# Altium PCB Attenuator_Proto.PcbDoc
Units mil, origin at the board's own origin, x right, y up, seen from the top; angles counter-clockwise.
Board outline 3679.97 x 2314.97 mil, 2 copper layers (Top Layer, Bottom Layer); 101 components, 62 nets, 362 pads, 43 vias.
Unrouted connection lines stored in the file: 42.
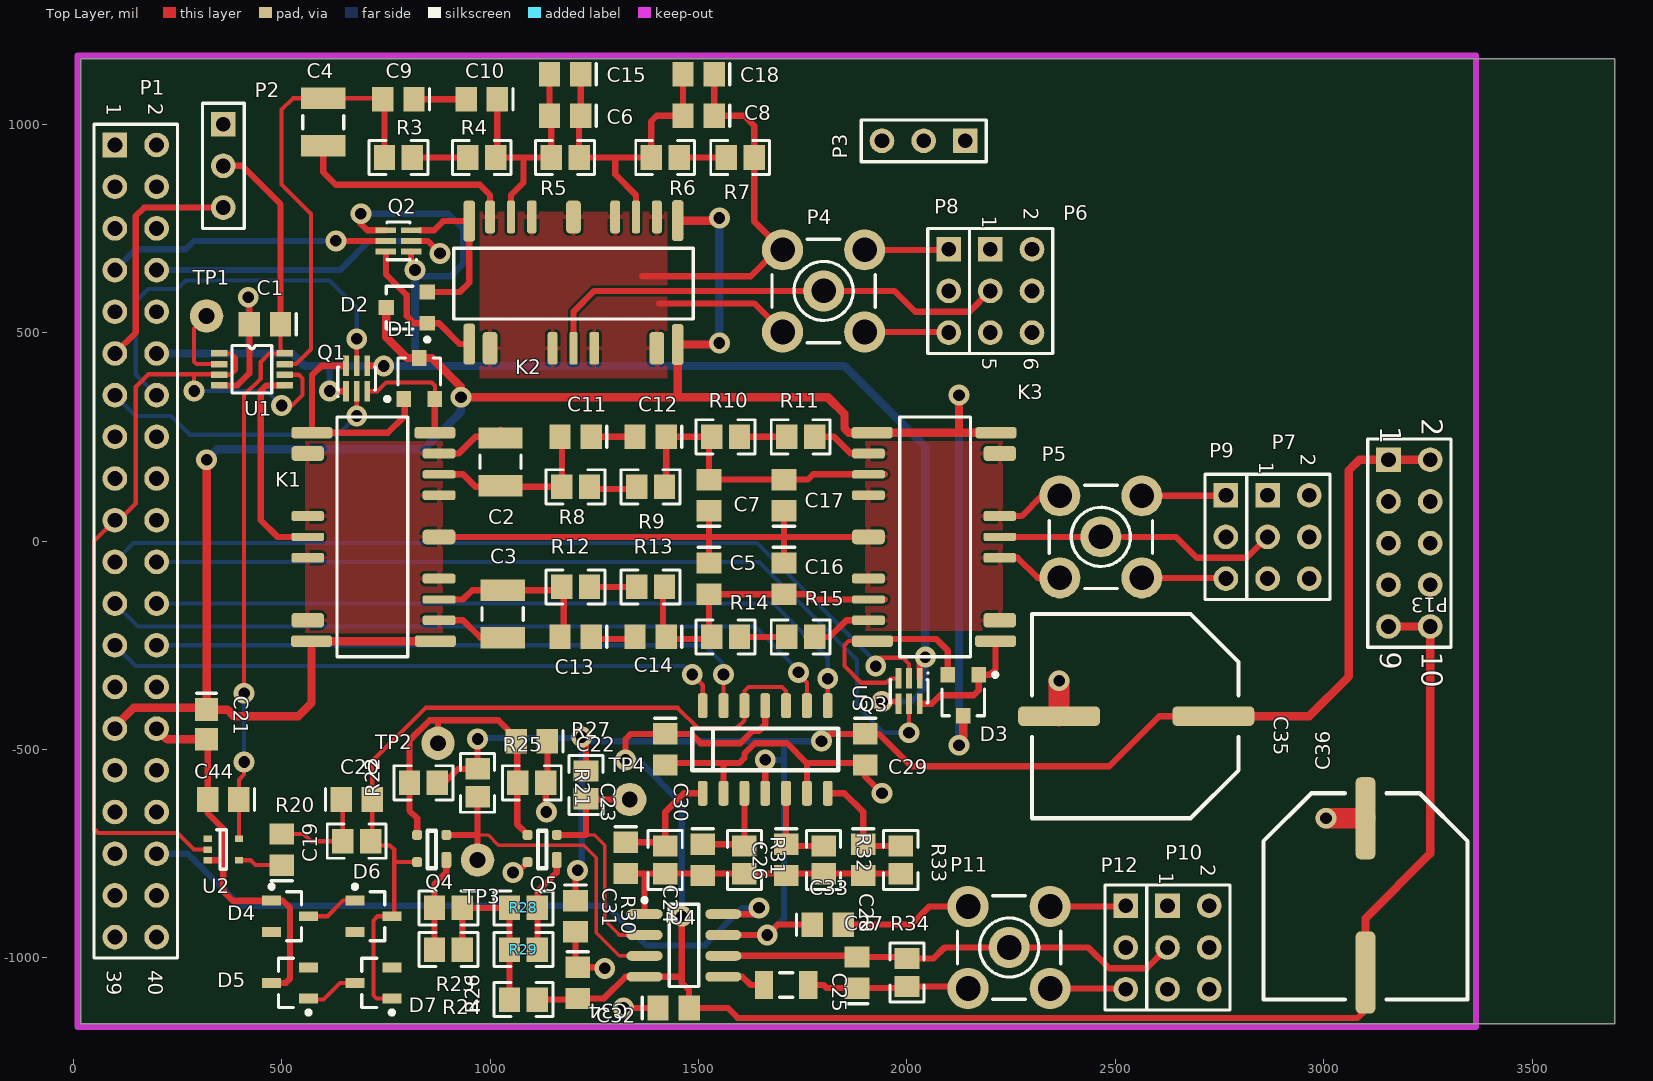
[diagram p0: Top Layer view]
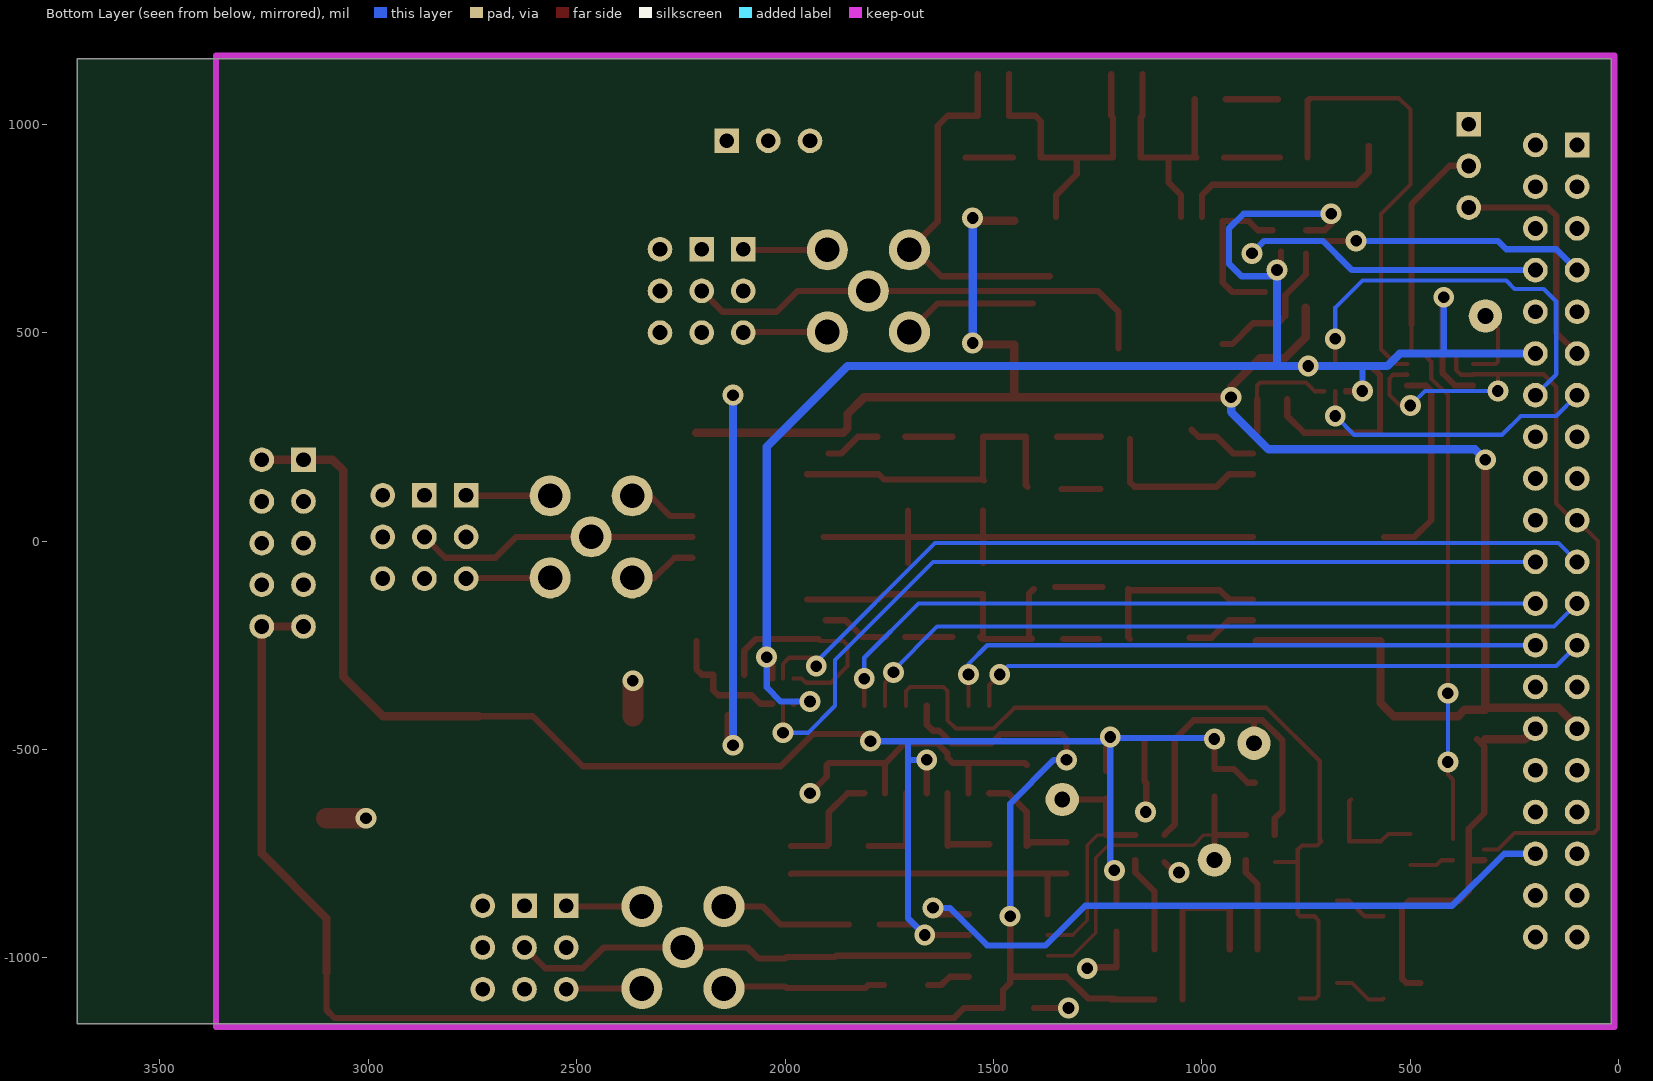
[diagram p1: Bottom Layer view, seen from below]

## Layer stack, top to bottom
Top Layer: signal copper 1.4
Dielectric: dielectric 12.6, FR-4, Dk 4.8
Bottom Layer: signal copper 1.4

## Board outline
17.52,-1157.48 17.52,1157.48 3697.48,1157.48 3697.48,-1157.48

## Design rules (kind name [scope] priority, off if disabled: settings)
Clearance [All] p1: gap=6
DiffPairsRouting [All] p1: maxlimit=10 minlimit=6 mostfreqgap=8 maxuncoupledlength=500
HoleSize [All] p1: absolutevalues=TRUE maxlimit=300 minlimit=13 maxpercent=80.000 minpercent=20.000
HoleToHoleClearance [All] p1: gap=6 allowstackedmicrovias=TRUE
MinimumAnnularRing [All] p1: minimumring=7
MinimumSolderMaskSliver [All] p1: minsoldermaskwidth=1
PolygonConnect [All] p1: connectstyle=Relief reliefconductorwidth=10 reliefentries=4 polygonreliefangle="90 Angle"
RoomDefinition Attenuator_Proto [InComponentClass('Attenuator_Proto')] p1: confinementstyle=ConfineOut formatcopy=TRUE lockcomponents=FALSE outline -65,1310 805,1310 805,1955 -65,1955
RoomDefinition Att_steet_1 [InComponentClass('Att_steet_1')] p2: confinementstyle=ConfineOut formatcopy=TRUE lockcomponents=FALSE outline 2685,-1500 3480,-1500 3480,-1240 2685,-1240
RoutingVias [All] p1: holewidth=20 width=38 viastyle="Through Hole" minholewidth=13 minwidth=28 maxholewidth=28 maxwidth=50
SilkToSilkClearance [All] p1: silktosilkclearance=6
SilkscreenOverComponentPads [All] p1: minsilkscreentomaskgap=6
SolderMaskExpansion [All] p1: expansion=4
Width [All] p1: maxlimit=50 minlimit=6 preferedwidth=10
22 further rules are at their usual default settings.

## Classes and differential pairs
component class Attenuator_Proto: C1 C2 C3 C4 C5 C6 C7 C8 C9 C10 C11 C12 C13 C14 C15 C16 C17 C18 C21 D1 D2 D3 K1 K2 K3 P1 P2 P3 P4 P5 P6 P7 P8 P9 Q1 Q2 Q3 R3 R4 R5 R6 R7 R8 R9 R10 R11 R12 R13 R14 R15 TP1 U1
component class Att_steet_1: 1 C19 C20 C22 C23 C24 C25 C26 C27 C28 C29 C30 C31 C32 C33 C34 C35 C36 C44 D4 D5 D6 D7 P10 P11 P12 P13 Q4 Q5 R20 R21 R22 R23 R24 R25 R26 R27 R28 R29 R30 R31 R32 R33 R34 TP2 TP3 TP4 U2 U3 U4

## Components (designator, comment, footprint, x,y, rotation, side; value= is the part's Value field where it differs from the comment)
C1 "Cap" C0805 460,520 r180 top
C2 "Cap Var" CAPC3225N 1025,190 r270 top
C3 "Cap Var" CAPC3225N 1030,-175 r90 top
C4 "Cap Var" CAPC3225N 600,1005 r90 top
C5 "Cap" c0805 1525,-90 r270 top
C6 "Cap" c0805 1180,1020 r180 top
C7 "Cap" c0805 1525,110 r90 top
C8 "Cap" c0805 1500,1020 r180 top
C9 "Cap" c0805 780,1060 r180 top
C10 "Cap" c0805 980,1060 r180 top
C11 "Cap" c0805 1205,250 r180 top
C12 "Cap" c0805 1385,250 r180 top
C13 "Cap" c0805 1205,-230 r180 top
C14 "Cap" c0805 1385,-230 r180 top
C15 "Cap" c0805 1180,1120 r180 top
C16 "Cap" c0805 1705,-90 r270 top
C17 "Cap" c0805 1705,110 r90 top
C18 "Cap" c0805 1500,1120 r180 top
C19 "C0805" 0805#1 500,-740 r90 top
C20 "C0805" 0805#1 680,-620 r0 top
C21 "Cap Semi" CAPC2512L 320,-440 r270 top
C22 "C0805" 0805#1 1100,-480 r180 top
C23 "C0805" 0805#1 1325,-760 r270 top
C24 "C0805" 0805#1 1510,-765 r270 top
C25 "Cap Semi" CAPC3216L 1710,-1065 r0 top
C26 "C0805" 0805#1 1710,-765 r270 top
C27 "C0805" 0805#1 1880,-1035 r90 top
C28 "C0805" 0805#1 1895,-765 r270 top
C29 "C0805" 0805#1 1900,-500 r270 top
C30 "C0805" 0805#1 1420,-500 r270 top
C31 "C0805" 0805#1 1205,-900 r270 top
C32 "C0805" 0805#1 1210,-1060 r270 top
C33 "C0805" 0805#1 1810,-920 r0 top
C34 "C0805" 0805#1 1440,-1120 r0 top
C35 "Cap" H13 2550,-420 r90 top
C36 "Cap" H13 3100,-850 r180 top
C44 "Cap" C0805 360,-620 r180 top
D1 "BAS40-05" SOT-23 830,390 r0 top
D2 "BAS40-05" SOT-23 800,560 r90 top
D3 "BAS40-05" SOT-23 2135,-370 r180 top
D4 "Diode BAS21" SOT95P240-3N 520,-900 r0 top
D5 "Diode BAS21" SOT95P240-3N 520,-1060 r180 top
D6 "Diode BAS21" SOT95P240-3N 720,-900 r0 top
D7 "Diode BAS21" SOT95P240-3N 720,-1060 r180 top
K1 "HF3_2coils_latching" HF3-75_Ohm 720,10 r0 top
K2 "HF3_2coils_latching" HF3-75_Ohm 1200,620 r90 top
K3 "HF3_2coils_latching" HF3-75_Ohm 2065,10 r180 top
P1 "Header 20X2" HDR2X20 100,950 r270 top locked
P2 "Header 3" HDR1X3 360,1000 r270 top
P3 "Header 3" HDR1X3 2140,960 r180 top
P4 "SMB" SMB_V-RJ45 1800,600 r0 top
P5 "SMB" SMB_V-RJ45 2465,10 r0 top
P6 "Header 3X2" HDR2X3 2200,700 r270 top
P7 "Header 3X2" HDR2X3 2865,110 r270 top
P8 "Header 3" HDR1X3 2100,700 r270 top
P9 "Header 3" HDR1X3 2765,110 r270 top
P10 "Header 3X2" HDR2X3 2625,-875 r270 top
P11 "SMB" SMB_V-RJ45 2245,-975 r0 top
P12 "Header 3" HDR1X3 2525,-875 r270 top
P13 "Header 5X2" HDR2X5 3155,195 r270 top
Q1 "DDCxxxxU" SOT-363 680,390 r0 top
Q2 "DDCxxxxU" SOT-363 780,720 r90 top
Q3 "DDCxxxxU" SOT-363 2005,-360 r180 top
Q4 "MOSFET" SOT143 860,-740 r90 top
Q5 "MOSFET" SOT143 1125,-740 r90 top
R3 "Res2" 0805#2 780,920 r180 top
R4 "Res2" 0805#2 980,920 r180 top
R5 "Res2" 0805#2 1180,920 r180 top
R6 "Res2" 0805#2 1420,920 r180 top
R7 "Res2" 0805#2 1600,920 r180 top
R8 "Res2" 0805#2 1205,130 r180 top
R9 "Res2" 0805#2 1385,130 r180 top
R10 "Res2" 0805#2 1565,250 r180 top
R11 "Res2" 0805#2 1745,250 r180 top
R12 "Res2" 0805#2 1205,-110 r180 top
R13 "Res2" 0805#2 1385,-110 r180 top
R14 "Res2" 0805#2 1565,-230 r180 top
R15 "Res2" 0805#2 1745,-230 r180 top
R20 "ERA6Y" 0805#2 680,-720 r180 top
R21 "ERA6Y" 0805#2 1100,-580 r0 top
R22 "ERA6Y" 0805#2 840,-580 r180 top
R23 "ERA6Y" 0805#2 900,-880 r180 top
R24 "ERA6Y" 0805#2 900,-980 r180 top
R25 "ERA6Y" 0805#2 970,-580 r270 top
R26 "ERA6Y" 0805#2 1080,-1100 r180 top
R27 "ERA6Y" 0805#2 1230,-585 r270 top
R28 "ERA6Y" 0805#2 1080,-880 r180 top
R29 "ERA6Y" 0805#2 1080,-980 r180 top
R30 "ERA6Y" 0805#2 1420,-765 r270 top
R31 "ERA6Y" 0805#2 1610,-765 r270 top
R32 "ERA6Y" 0805#2 1800,-765 r270 top
R33 "ERA6Y" 0805#2 1985,-765 r270 top
R34 "ERA6Y" 0805#2 2000,-1035 r90 top
TP1 "TESTPOINT" TESTPOINT 320,540 r0 top
TP2 "TESTPOINT" TESTPOINT 875,-485 r0 top
TP3 "TESTPOINT" TESTPOINT 970,-765 r0 top
TP4 "TESTPOINT" TESTPOINT 1335,-620 r0 top
U1 "SN74LVC3G17DCTR" sm8 350,450 r0 top
U2 "SN74LVC1G17" SC_70_5 360,-740 r270 top
U3 "AD8182" SO14 1660,-500 r0 top
U4 "AD707AR" SO-8_N 1465,-970 r0 top

## Footprints (in the part's own frame and the unit in brackets; to place one, negate y for a bottom-side part, rotate by r counter-clockwise, add the part's x,y. Pads: shape width x height; smd on the part's side, far side on the other; paste and mask are expansions set on the pad)
0805#1 [mm] "Chip Capacitor; Body 2.0 x 1.2 mm (LxW typ)"
  rect 1.3x1.5 smd: 1(-0.95,0) 2(0.95,0)
  silkscreen extent -1.9,-0.65 -1.9,0.65
0805#2 [mm] "0805 from SM-752 data"
  rect 1.3x1.5 smd: 1(-0.85,0) 2(0.85,0)
  silkscreen extent -1.79,-1.04 1.79,1.04, body extent -1.1,-0.72 1.1,0.72, height 1.1
C0805 [mm] "Chip Capacitor; Body 2.0 x 1.2 mm (LxW typ)"
  rect 1.3x1.5 smd: 1(-0.95,0) 2(0.95,0)
  silkscreen extent -1.9,-0.65 -1.9,0.65
c0805 [mm] "Chip Capacitor; Body 2.0 x 1.2 mm (LxW typ)"
  rect 1.3x1.5 smd: 1(-0.95,0) 2(0.95,0)
  silkscreen extent -1.9,-0.65 -1.9,0.65
CAPC2512L [mm] "Chip Capacitor, Body 2.54x1.27mm, IPC High Density"
  rect 1.4x1.4 smd: 1(-0.9,0) 2(0.9,0)
  silkscreen extent -1.9,-0.6 -1.9,0.6, body extent -1.45,-0.82 1.45,0.82, height 1.3
CAPC3216L [mm] "Chip Capacitor, Body 3.2x1.6mm, IPC High Density"
  rect 1.1x1.7 smd: 1(-1.35,0) 2(1.35,0)
  silkscreen extent -0.4,-0.75 0.4,0.75, body extent -1.7,-0.9 1.7,0.9, height 1.3
CAPC3225N [mm] "Chip Capacitor, Body 3.2x2.5mm, IPC Medium Density"
  rect 1.3x2.7 smd: 1(-1.45,0) 2(1.45,0)
  silkscreen extent -0.4,-1.25 0.4,1.25, body extent -1.7,-1.35 1.7,1.35, height 1.5
H13 [mm] "Lyt aluminum Cap SMD"
  rrect50% 1.2x5 smd: 1(0,-4.699) 2(0,4.699)
  silkscreen extent -6.22,-6.22 6.22,6.35
HDR1X3 [mm] "Connector; Header; 3 Position"
  rect 1.5x1.5 hole 0.9: 1(0,0)
  round 1.5 hole 0.9: 2(2.54,0) 3(5.08,0)
  silkscreen extent -1.27,-1.27 6.35,1.27
HDR2X3 [mm] "Connector; Header; 3x2 Position"
  rect 1.5x1.5 hole 0.9: 1(0,0)
  round 1.5 hole 0.9: 2(0,2.54) 3(2.54,0) 4(2.54,2.54) 5(5.08,0) 6(5.08,2.54)
  silkscreen extent -1.27,-1.27 6.35,3.81
HDR2X5 [mm] "Connector; Header; 5x2 Position"
  rect 1.5x1.5 hole 0.9: 1(0,0)
  round 1.5 hole 0.9: 2(0,2.54) 3(2.54,0) 4(2.54,2.54) 5(5.08,0) 6(5.08,2.54) 7(7.62,0) 8(7.62,2.54) 9(10.16,0) 10(10.16,2.54)
  silkscreen extent -1.27,-1.27 11.43,3.81
HDR2X20 [mm] "Connector; Header; 20x2 Position"
  rect 1.5x1.5 hole 0.9: 1(0,0)
  round 1.5 hole 0.9: 2(0,2.54) 3(2.54,0) 4(2.54,2.54) 5(5.08,0) 6(5.08,2.54) 7(7.62,0) 8(7.62,2.54) 9(10.16,0) 10(10.16,2.54) 11(12.7,0) 12(12.7,2.54) 13(15.24,0) 14(15.24,2.54) 15(17.78,0) 16(17.78,2.54) 17(20.32,0) 18(20.32,2.54) 19(22.86,0) 20(22.86,2.54) 21(25.4,0) 22(25.4,2.54) 23(27.94,0) 24(27.94,2.54) 25(30.48,0) 26(30.48,2.54) 27(33.02,0) 28(33.02,2.54) 29(35.56,0) 30(35.56,2.54) 31(38.1,0) 32(38.1,2.54) 33(40.64,0) 34(40.64,2.54) 35(43.18,0) 36(43.18,2.54) 37(45.72,0) 38(45.72,2.54) 39(48.26,0) 40(48.26,2.54)
  silkscreen extent -1.27,-1.27 49.53,3.81
HF3-75_Ohm [mm]
  rrect50% 2.5x0.7 smd: 1(-3.746,6.35) 11(-3.771,-6.35) 12(3.771,-6.35) 22(3.747,6.35)
  rrect50% 2x0.9 smd: 2(-4,5.08) 10(-4,-5.08) 17(4,0)
  rrect50% 2x0.6 smd: 5(-4,1.27) 7(-4,-1.27) 13(4,-5.08) 15(4,-2.54) 19(4,2.54) 21(4,5.08)
  rrect50% 2x0.5 smd: 6(-4,0) 14(4,-3.81) 20(4,3.81)
  silkscreen extent -2.22,-7.3 2.1,7.3, body extent -3.56,-7.37 3.56,7.37, height 10
SC_70_5 [mil]
  rect 15.73x19.67 smd: 1(-25.58,-37.4) 2(0,-37.4) 3(25.58,-37.4) 4(25.58,37.4) 5(-25.58,37.4)
  silkscreen extent -47,-16 47,8
sm8 [mm]
  rect 1x0.4 smd: 1(0,0) 2(0,-0.65) 3(0,-1.3) 4(0,-1.95) 5(4,-1.95) 6(4,-1.3) 7(4,-0.65) 8(4,0)
  silkscreen extent 0.79,-2.41 3.2,0.48, body extent 0.69,-2.51 3.3,0.58, height 1.3
SMB_V-RJ45 [mm] "Connector; SMB Straight"
  round 2.5 hole 1.5: 1(0,0) 2(-2.5,-2.5) 2(-2.5,2.5) 2(2.5,-2.5) 2(2.5,2.5)
  silkscreen extent -3.15,-3.15 3.15,3.15
SO14 [mil]
  rrect50% 23.62x60 smd: 1(-150,-105) 2(-100,-105) 3(-50,-105) 4(0,-105) 5(50,-105) 6(100,-105) 7(150,-105) 8(150,105) 9(100,105) 10(50,105) 11(0,105) 12(-50,105) 13(-100,105) 14(-150,105)
  silkscreen extent -175,-50 175,50
SO-8_N [mm] "SOIC, 8-Leads, Body 4.9x3.9mm, Pitch 1.27mm, IPC Medium Density"
  oval 2.2x0.6 smd: 1(-2.4,1.905) 2(-2.4,0.635) 3(-2.4,-0.635) 4(-2.4,-1.905) 5(2.4,-1.905) 6(2.4,-0.635) 7(2.4,0.635) 8(2.4,1.905)
  silkscreen extent -2.52,-2.5 0.9,2.88, body extent -1.95,-2.45 1.95,2.45, height 1.75
SOT95P240-3N [mm] "SOT23, 3-Leads, Body 2.9x1.3mm, Pitch 0.95mm, Lead Span 2.4mm, IPC Medium Density"
  rect 1.15x0.6 smd: 1(-1.125,0.95) 2(-1.125,-0.95) 3(1.125,0)
  silkscreen extent -1.25,-1.5 0.7,1.92, body extent -0.7,-1.5 0.7,1.5, height 1.14
SOT143 [mm]
  rrect50% 1x0.6 smd: 1(-0.635,-0.889)
  rrect50% 0.6x0.6 smd: 2(0.889,-0.889) 3(0.889,0.889) 4(-0.762,0.889)
  silkscreen extent -1.14,-0.25 1.14,0.25
SOT-23 [mm] "SOT-23; 3 Leads; Body 3.0 x 2.6 mm, inc. leads (LxW max)"
  rect 0.9x0.95 smd: 1(-0.95,-1.25) 2(0.95,-1.25) 3(0,1.25)
  silkscreen extent -2.07,-1.37 1.3,1.25
SOT-363 [mm] "SOT-363/SC-88; 6 Leads; Body 2.2 x 2.2 mm, inc. leads (LxW max)"
  rect 0.35x1.25 smd: 1(-0.65,-0.775) 2(0,-0.775) 3(0.65,-0.775) 4(0.65,0.775) 5(0,0.775) 6(-0.65,0.775)
  silkscreen extent -1.2,-1.15 1.15,0.7
TESTPOINT [mil]
  round 80 hole 37.99: 1(0,0)

## Part data
C1 C5 C6 C7 C8 C9 C10 C11 C12 C13 C14 C15 C16 C17 C18 C44: "Capacitor"
C2 C3 C4: "Variable or Adjustable Capacitor"
C19 C20 C22 C23 C24 C26 C27 C28 C29 C30 C31 C32 C33 C34: "Ceramic Chip Capacitor - Standard"
C21 C25: "Capacitor (Semiconductor SIM Model)"
C35 C36: library part "Lyt Cap"
D1 D2 D3: "Silicon AF Schottky Diode for High-Speed Switching"
D4 D5 D6 D7: "Silicon Switching Diode for High-Speed, High-Voltage Switching"
K1 K2 K3: "HF3 Relay, Latching type, 2 coils"
P1: "Header, 20-Pin, Dual row"
P2 P3 P8 P9 P12: "Header, 3-Pin"
P4 P5 P11: "SMB Straight Connector"
P6 P7 P10: "Header, 3-Pin, Dual row"
P13: "Header, 5-Pin, Dual row"
Q1 Q2 Q3: "NPN PRE-BIASED SMALL SIGNAL DUAL SURFACE MOUNT TRANSISTOR"
Q4 Q5: library part BF998, "Dual-gate MOSFET"
R3 R4 R5 R6 R7 R8 R9 R10 R11 R12 R13 R14 R15: "Resistor"
R20 R21 R22 R23 R24 R25 R26 R27 R28 R29 R30 R31 R32 R33 R34: "Rectangular Thick Film Chip Resistor, 10 Ohm to 1M Ohm Range, 0.1% and 0.5% Tolerance, 0805 Size, 0.1 W"
TP1 TP2 TP3 TP4: "TEST POINT.  No entry in BOM."
U4: "Ultra-Low Drift Operational Amplifier"

## Via types
v1: diameter 50, hole 28, Top Layer to Bottom Layer, 43 vias

## Nets (pads, with @x,y where several pads share a name; then routed paths per layer and width w, separated by ;. In a path a pad name is that pad's centre, name@x,y a point inside that pad or via, vN(x,y) a via of type N, cw(c..) or ccw(c..) an arc to the next point about the centre after c; other vN are vias at no path point)
3V: C21.1 D1.3 D2.3 D3.3 K1.11 K1.12 K2.11 K2.12 K3.11 K3.12 P1.29 P2.1 | length 5551.5
  Top Layer w20: P1.29 100,-445 145,-400 315.43,-400 C21.1 ; v1(320,195) C21.1 ; D2.3 750.79,489.21 800.79,439.21 D1.3 860.79,439.21 930,370 v1(930,345) 1450,345 ; K1.12 K1.11 571.52,-388.48 540,-420 385,-420 369.57,-404.57 C21.1 ; K2.12 1543.48,768.48 v1(1550,775) ; v1(1550,475) 1546.52,471.52 K2.11 1450,345 ; v1(2125,-490) 2130,-480 2135,-470 D3.3 ; v1(2125,350) 2125,260 ; K3.11 2125,260 ; 1450,345 1810,345 1850,305 1850,270 1860,260 K3.12 2125,260
  Bottom Layer w20: v1(320,195) 345,220 840,220 930,310 v1(930,345) ; v1(1550,475) v1(1550,775) ; v1(2125,-490) v1(2125,350)
5V: P1.11 P2.3 | length 569
  Top Layer w15: P1.11 150,500 150,780 170,800 P2.3
+5V: C29.1 C31.1 C33.1 C35.1 P13.1 P13.2 R22.1 R25.1 R27.1 U3.4 U4.7 | length 4424.9
  Top Layer w15: R22.1 890,-580 923.46,-546.54 R25.1 v1(970,-475) ; C31.1 1205,-795 v1(1210,-790) ; v1(1220,-470) 1230,-480 R27.1 ; U4.7 v1(1665,-945) 1690,-920 C33.1 ; U3.4 v1(1660,-525) ; v1(1795,-480) 1812.4,-462.6 C29.1 1932.6,-462.6 2010,-540 2485,-540 2605,-420 C35.1
  Top Layer w20: C35.1 2965,-420 3060,-325 3060,170 3085,195 P13.1 P13.2
  Bottom Layer w15: v1(970,-475) 972.5,-472.5 v1@1217.5,-472.5 ; v1(1210,-790) 1220,-780 v1(1220,-470) 1230,-480 1705,-480 ; v1@1655,-530 v1(1660,-525) 1705,-525 ; v1(1665,-945) 1705,-905 1705,-525 ; v1(1795,-480) 1705,-480 ; 1705,-525 1705,-480
-5V: C30.1 C32.2 C34.2 C36.2 P13.9 P13.10 R26.1 U3.11 U4.4 | length 4242.7
  Top Layer w15: R26.1 1217.4,-1100 C32.2@1220,-1097.4 ; C32.2 1272.6,-1097.4 1325,-1045 U4.4 1460,-1045 ; v1(1325,-525) 1325,-475 1337.4,-462.6 C30.1 1482.4,-462.6 1504.8,-485 1600,-485 1630,-455 1645,-455 1660,-440 U3.11 ; v1(1460,-900) 1460,-1045 ; C36.2 3100,-1125 3081,-1144 1594,-1144 1570,-1120 C34.2 1477.4,-1077.4 1460,-1060 1460,-1045
  Top Layer w20: C36.2 3100,-905 3255,-750 P13.10 P13.9
  Bottom Layer w15: v1(1325,-525) 1355,-525 1460,-630 v1(1460,-900)
ATT1: C4.2 C9.2 R3.2 U1.7 | length 1076.7
  Top Layer w10: U1.7 534.41,424.41 570,460 570,785 500,855 500,1035 527.09,1062.09 C9.2@742.6,1062.09
  Top Layer w15: C9.2 746.54,1056.06 R3.2
ATT2: K1.6 U1.5 | length 502
  Top Layer w15: U1.5 463.23,373.23 450,360 450,50 490,10 K1.6
ATT10: C2.2 C11.2 K1.20 R8.2 | length 416.1
  Top Layer w15: K1.20 935,160 965,130 1161.54,130 1172.6,141.06 C11.2@1172.6,245
ATT100: C3.2 C13.2 K1.14 R12.2 | length 431
  Top Layer w15: K1.14 935,-140 957.09,-117.91 C3.2 1173.62,-117.91 1176.54,-115 1176.54,-231.06 C13.2@1172.6,-235
CLK: P1.19 U1.1 U1.3 U1.6 U2.2 | length 2144.5
  Top Layer w10: v1(290,360) 290,400 ; U2.2 290,-740 250,-700 60,-700 50,-690 50,0 P1.19 110,50 150,90 150,370 180,400 290,400 ; U1.3 378.82,398.82 390,410 390,440 380,450 U1.1 ; U1.3@350,400 290,400 ; v1(500,325) 525,325 550,350 550,390 541.18,398.82 U1.6 U1.6@508.66,400
  Bottom Layer w10: v1(290,360) 465,360 v1(500,325)
GND: C1.2 C2.1 C3.1 C4.1 C5.1 C7.1 C8.1 C16.1 C17.1 C18.1 C21.2 C22.1 C25.2 C27.1 C29.2 C30.2 C31.2 C32.1 C33.2 C34.1 C35.2 C36.1 C44.2 D4.1 D5.3 K1.2 K1.5 K1.7 K1.10 K1.13 K1.15 K1.17 K1.19 K1.21 K2.2 K2.5 K2.7 K2.10 K2.13 K2.15 K2.17 K2.19 K2.21 K3.2 K3.5 K3.7 K3.10 K3.13 K3.15 K3.17 K3.19 K3.21 P1.12 P1.30 P3.1 P3.2 P3.3 P4.2 P5.2 P6.1 P6.2 P6.4 P6.5 P6.6 P7.1 P7.2 P7.4 P7.5 P7.6 P8.1 P8.2 P8.3 P9.1 P9.2 P9.3 P10.1 P10.2 P10.4 P10.5 P10.6 P11.2 P12.1 P12.2 P12.3 P13.5 P13.6 Q1.1 Q1.4 Q2.1 Q2.4 Q3.1 Q3.4 Q5.4 R7.1 R11.1 R15.1 R21.2 R34.1 U1.4 U2.3 U3.2 U3.6 | length 12341.9
  Top Layer w15: U2.3 355.58,-765.58 360,-770 ; C21.2@340,-475.43 322.6,-492.83 C44.2 322.6,-652.6 360,-690 360,-770 ; U1.4 393.23,373.23 422.6,402.6 C1.2 v1@422.6,572.4 ; D5.3 510,-1060 520,-1050 520,-880 502.6,-862.6 D4.1 382.6,-862.6 360,-840 360,-770 ; C4.1 600,885 630,855 975,855 1000,830 K2.21 ; v1(615,360) 615.51,359.49 Q1.1 ; v1(690,785) 690,761.18 705.59,745.59 Q2.4 ; Q1.4 744.49,420.51 v1(745,420) ; v1@810.51,659.49 Q2.1 ; K1.13 935,-190 977.09,-232.09 C3.1 ; K1.17 1525,10 ; K1.21 925,210 965,250 1007.91,250 C2.1@1025,267.09 ; v1(1055,-795) 1065,-795 Q5.4 ; v1(1135,-650) 1133.46,-648.46 R21.2 1137.4,-576.06 C22.1 ; C32.1@1205,-1022.6 C31.2 ; C32.1 1272.6,-1022.6 v1(1275,-1025) ; v1(1320,-1120) C34.1 ; 1365,635 1625,635 1688.43,698.43 1701.57,698.43 1633.46,766.54 R7.1 1633.46,996.54 1610,1020 C8.1 C18.1 ; 1405,570 1633.15,570 P4.2@1701.57,501.57 ; C30.2 1424.8,-532.6 1560,-532.6 ; C5.1 1525,10 ; C7.1 1525,10 ; U3.2 1560,-532.6 ; C16.1 1705,10 ; C17.1 1705,10 ; R15.1@1758.46,-230 1815,-230 1854.99,-190.01 K3.21@1902.52,-190.01 ; U3.6 1760,-532.6 ; C25.2 1800,-1065 1807.4,-1072.4 C27.1 1996.06,-1072.4 R34.1 2141.61,-1068.46 P11.2@2146.57,-1073.43 ; R11.1 1825,250 1865,210 K3.13@1895,210 ; C33.2 2010,-920 2053.43,-876.57 P11.2@2146.57,-876.57 ; P4.2@1898.43,501.57 2098.43,501.57 P8.3 ; P4.2@1898.43,698.43 2098.43,698.43 P8.1 ; K3.17 1705,10 ; v1(1940,-605) 1900,-565 C29.2 1895.2,-532.6 1760,-532.6 ; v1(1940,-385) 1973.9,-385 Q3.4 ; Q3.1 2030.59,-289.41 2041.5,-278.5 v1(2044.05,-278.5) ; K3.5 2265,-40 2313.43,-88.43 P5.2@2366.57,-88.43 ; K3.7 2275,60 2323.43,108.43 P5.2@2366.57,108.43 ; P11.2@2343.43,-1073.43 2523.43,-1073.43 P12.3 ; P11.2@2343.43,-876.57 2523.43,-876.57 P12.1 ; P5.2@2353.43,108.43 P5.2@2366.57,108.43 ; P5.2@2360,115 P5.2@2366.57,108.43 ; P5.2@2563.43,-88.43 2763.43,-88.43 P9.3 ; P5.2@2563.43,108.43 2763.43,108.43 P9.1 ; 1525,10 1705,10 ; 1560,-532.6 1597.4,-532.6 1610,-520 1610,-510 1635,-485 1712.4,-485 1760,-532.6
  Top Layer w20: P1.30 225.43,-475.43 C21.2
  Top Layer w50: C35.2 v1(2365,-335) ; v1(3005,-665) C36.1
  Bottom Layer w15: v1(420,585) 420,455 425,450 ; v1(615,360) 615,420 ; v1(690,785) 900,785 935,750 935,665 905,635 835,635 v1(820,650) ; v1(1940,-385) 2010,-385 2044.05,-350.95 v1(2044.05,-278.5)
  Bottom Layer w20: P1.12 425,450 525,450 555,420 615,420 v1(745,420) 820,420 ; v1(820,650) 820,420 ; v1(2044.05,-278.5) 2044.05,225.95 1850,420 820,420
IN2_10: P1.13 Q1.2 | length 697.5
  Top Layer w10: v1(680,300) Q1.2
  Bottom Layer w10: P1.13 150,300 235,300 280,255 635,255 v1(680,300)
IN2_100: P1.14 Q1.5 | length 962.8
  Top Layer w10: Q1.5 v1(680,485)
  Bottom Layer w10: P1.14 150,400 150,575 180,605 250,605 270,625 615,625 680,560 v1(680,485)
NetC5_2: C5.2 C14.1 C16.2 K3.20 R13.1 R14.2 | length 787.2
  Top Layer w15: R13.1@1403.46,-115 1415,-126.54 1415,-227.4 1407.4,-235 1526.54,-235 R14.2 1525,-223.46 C5.2 C16.2 1762.4,-127.4 1775,-140 1947.52,-140
NetC6_1: C6.1 C8.2 C15.1 C18.2 K2.14 R5.1 R6.2 | length 806.1
  Top Layer w15: C15.1 C6.1 1213.46,1016.06 R5.1 1300,920 ; K2.14 1350,830 1300,880 1300,920 ; C18.2 C8.2 1400,1020 1386.54,1006.54 R6.2 1300,920
NetC6_2: C6.2 C10.1 C15.2 K2.20 R4.1 R5.2 | length 631.3
  Top Layer w15: C10.1 1017.4,923.94 R4.1 R5.2 1146.54,1016.06 C6.2 C15.2 ; K2.20 1050,830 1080,860 1080,920
NetC7_2: C7.2 C12.1 C17.2 K3.14 R9.1 R10.2 | length 758
  Top Layer w15: R9.1 1422.4,133.94 C12.1 1525,250 C7.2 ; C7.2@1522.6,145 C7.2 ; 1947.52,160 1775,160 1762.4,147.4 C17.2 C7.2
NetC9_1: C9.1 C10.2 | length 125.2
  Top Layer w15: C9.1 C10.2
NetC11_1: C11.1 C12.2 | length 105.2
  Top Layer w15: C11.1 C12.2
NetC13_1: C13.1 C14.2 | length 85.2
  Top Layer w15: C13.1@1247.4,-235 C14.2@1332.6,-235
NetC19_1: C19.1 U2.4 | length 107.5
  Top Layer w10: U2.4 425.58,-765.58 437.4,-777.4 C19.1
NetC19_2: C19.2 C20.1 R20.2 | length 255.4
  Top Layer w10: C19.2 552.6,-702.6 570,-720 R20.2 646.54,-623.94 C20.1
NetC20_2: C20.2 D6.3 D7.1 Q4.4 R20.1 U3.10 U3.12 | length 1939.7
  Top Layer w10: D7.1 727.4,-1097.4 720,-1090 720,-910 730,-900 D6.3 770,-894.29 770,-770 ; Q4.4 770,-770 ; U3.10 1710,-360 1700,-350 1620,-350 1610,-360 U3.12 1610,-430 1590,-450 1500,-450 1450,-400 845,-400 717.4,-527.6 C20.2 717.4,-716.06 R20.1 723.46,-730 760,-730 770,-740 770,-770
NetC22_2: C22.2 Q4.3 Q5.3 R21.1 R22.2 TP2.1 | length 826.7
  Top Layer w15: Q4.3 825,-665 806.54,-646.54 R22.2 806.54,-478.46 855,-430 875,-430 ; TP2.1 875,-430 ; Q5.3 1065,-680 1065,-475 1020,-430 875,-430
NetC23_1: C23.1 R30.1 U3.1 | length 288.9
  Top Layer w15: C23.1 1411.06,-722.6 R30.1 1420,-650 1465,-605 U3.1
NetC23_2: C23.2 C24.2 C26.2 C28.2 R30.2 R31.2 R32.2 R33.2 U4.1 | length 758.3
  Top Layer w15: C23.2 1370,-797.4 ; U4.1 1370.51,-797.91 1370,-797.4 ; R33.2 1983.94,-797.4 1895,-797.4 1710,-797.4 1370,-797.4
NetC24_1: C24.1 R31.1 U3.3 | length 228.2
  Top Layer w15: C24.1 1606.06,-727.6 R31.1 U3.3
NetC25_1: C25.1 U4.5 | length 105.6
  Top Layer w15: U4.5 1605,-1045 1625,-1065 C25.1
NetC26_1: C26.1 R32.1 U3.5 | length 214.2
  Top Layer w15: U3.5 C26.1 1713.94,-731.54 R32.1
NetC28_1: C28.1 R33.1 U3.7 | length 272.9
  Top Layer w15: U3.7 1850,-605 1895,-650 C28.1 1898.94,-731.54 R33.1
NetD1_1: D1.1 K1.1 Q1.6 | length 503.6
  Top Layer w15: Q1.6@650,420.51 595.51,420.51 572.52,397.52 K1.1 755,260 795,300 D1.1@795,340
NetD1_2: D1.2 K1.22 Q1.3 | length 286
  Top Layer w10: Q1.3 729.49,359.49 750,380 860,380 867.52,372.48 D1.2@867.52,340
  Top Layer w15: K1.22 D1.2@867.52,340
NetD2_1: D2.1 K2.1 Q2.6 | length 348.7
  Top Layer w15: Q2.6@750,690 750,640 800,590 800,540 817.4,522.6 D2.1 877.4,522.6 927.48,472.52 K2.1
NetD2_2: D2.2 K2.22 Q2.3 | length 386.2
  Top Layer w15: Q2.3@830.51,745.59 865.59,745.59 887.52,767.52 K2.22 950,620 927.4,597.4 D2.2
NetD3_1: D3.1 K3.1 Q3.6 | length 305.3
  Top Layer w15: Q3.6 2059.49,-390.51 2080,-370 2160,-370 2172.4,-357.6 D3.1 2199.21,-320.79 2212.48,-307.52 K3.1
NetD3_2: D3.2 K3.22 Q3.3 | length 519.2
  Top Layer w10: K3.22 1860,-240 1850,-250 1850,-300 1890,-340 1950,-340 1960.51,-329.49 Q3.3
  Top Layer w15: K3.22@1920,-235 2070,-235 2097.6,-262.6 D3.2
NetD4_3: D4.3 D6.1 | length 126.9
  Top Layer w10: D4.3 610,-900 647.4,-862.6 D6.1
NetD5_1: D5.1 D7.3 | length 129.1
  Top Layer w10: D5.1 566.89,-1100 600,-1100 640,-1060 D7.3
NetQ4_1: Q4.1 R23.2 R24.2 | length 226.8
  Top Layer w15: R24.2 R23.2 866.54,-823.46 895,-795 Q4.1
NetQ4_2: Q4.2 R25.2 TP3.1 U4.3 | length 852.6
  Top Layer w8: 970,-705 995,-705 1020,-730 1225,-730 1255,-760 1255,-940 1310,-995 U4.3
  Top Layer w15: Q4.2 970,-705 ; TP3.1 970,-705 ; R25.2 970,-705
NetQ5_1: Q5.1 R28.1 R29.1 | length 234.3
  Top Layer w15: R29.1 R28.1 1113.46,-841.54 1160,-795 Q5.1
NetQ5_2: Q5.2 R27.2 TP4.1 U4.2 | length 607.5
  Top Layer w8: 1230,-705 1250,-705 1275,-730 1275,-910 1310,-945
  Top Layer w10: 1310,-945 U4.2
  Top Layer w15: Q5.2 1230,-705 R27.2 1231.54,-620 TP4.1
NetR3_1: R3.1 R4.2 | length 133.1
  Top Layer w15: R3.1 R4.2
NetR6_1: R6.1 R7.2 | length 113.1
  Top Layer w15: R6.1 R7.2
NetR8_1: R8.1 R9.2 | length 93.1
  Top Layer w15: R8.1@1243.46,125 R9.2@1336.54,125
NetR10_1: R10.1 R11.2 | length 113.1
  Top Layer w15: R10.1 R11.2
NetR12_1: R12.1 R13.2 | length 113.1
  Top Layer w15: R12.1 R13.2
NetR14_1: R14.1 R15.2 | length 113.1
  Top Layer w15: R14.1 R15.2
NetR23_1: R23.1 R24.1 R26.2 R28.2 R29.2 | length 433.1
  Top Layer w15: R24.1 R23.1 R28.2 R29.2 R26.2
NetTP1_1: TP1.1 U1.2 | length 184.7
  Top Layer w10: TP1.1 290,510 290,430 295.59,424.41 U1.2
OP_EN: P1.36 U4.8 | length 1665.1
  Top Layer w15: U4.8 1630,-895 v1(1645,-880)
  Bottom Layer w15: P1.36 275,-750 400,-875 1280,-875 1375,-970 1515,-970 1605,-880 v1(1645,-880)
OUT1: K2.6 P4.1 P6.3 | length 1149.6
  Top Layer w15: K2.6 1200,550 1250,600 P4.1 1970,600 2020,550 2150,550 P6.3
OUT1_10: P1.8 Q2.2 | length 803.8
  Top Layer w15: Q2.2@810,720 Q2.2 850,720 v1(880,690)
  Bottom Layer w15: P1.8 640,650 710,720 850,720 v1(880,690)
OUT1_100: P1.7 Q2.5 | length 678.5
  Top Layer w15: v1(630,720) Q2.5
  Bottom Layer w15: P1.7 150,700 270,700 290,720 v1(630,720)
OUT2: K3.6 P5.1 P7.3 | length 683.9
  Top Layer w15: K3.6 P5.1 2645,10 2695,-40 2815,-40 P7.3
OUT2_10: P1.21 Q3.2 | length 2106.5
  Top Layer w10: v1(1925,-300) 1925,-290 1935,-280 1990,-280 2005,-295 Q3.2
  Bottom Layer w10: P1.21 145,-5 1640,-5 1925,-290 v1(1925,-300)
OUT2_100: P1.22 Q3.5 | length 2108.8
  Top Layer w10: v1(2005,-460) Q3.5
  Bottom Layer w10: P1.22 1645,-50 1880,-285 1880,-395 1945,-460 v1(2005,-460)
OUT3_1_2: P1.26 U3.13 | length 1478.6
  Top Layer w10: U3.13 v1(1560,-320)
  Bottom Layer w10: P1.26 1515,-250 1560,-295 v1(1560,-320)
OUT3_5_10: P1.23 U3.9 | length 1833.1
  Top Layer w10: v1@1725,-315 v1(1740,-315) v1@1740,-320 ; v1@1740,-325 v1@1740,-320 ; U3.9 1760,-340 v1@1740,-320
  Bottom Layer w10: P1.23 155,-205 1635,-205 v1@1742.5,-312.5 ; v1@1725,-315 v1(1740,-315)
OUT3_MAIN: C27.2 P10.3 P11.1 R34.2 U4.6 | length 1120.6
  Top Layer w15: U4.6 1877.4,-995 C27.2 1996.06,-997.6 R34.2 2063.46,-1001.54 2090,-975 P11.1 2435,-975 2485,-1025 2575,-1025 P10.3
SEL3A: P1.25 U3.14 | length 1499.4
  Top Layer w10: v1(1485,-320) 1510,-345 U3.14
  Bottom Layer w10: P1.25 150,-300 1465,-300 v1(1485,-320)
SEL3B: P1.24 U3.8 | length 1778.8
  Top Layer w10: U3.8 v1(1810,-330)
  Bottom Layer w10: P1.24 1680,-150 1810,-280 v1(1810,-330)
SRCV: C1.1 C44.1 P2.2 U1.8 U2.5 | length 1769.4
  Top Layer w10: U2.5 C44.1 397.4,-572.6 410,-560 v1(410,-530) ; v1(410,-365) 410,350 450,390 450,430 470,450 U1.8 497.4,460.08 C1.1
  Top Layer w15: P2.2 405,900 497.4,807.6 C1.1
  Bottom Layer w10: v1(410,-530) v1(410,-365)
pads on no net: D4.2 D5.2 D6.2 D7.2 P1.1 P1.2 P1.3 P1.4 P1.5 P1.6 P1.9 P1.10 P1.15 P1.16 P1.17 P1.18 P1.20 P1.27 P1.28 P1.31 P1.32 P1.33 P1.34 P1.35 P1.37 P1.38 P1.39 P1.40 P13.3 P13.4 P13.7 P13.8 U2.1

## Polygon pours and split planes (outlines as drawn)
GND on Top Layer "Top Layer-No Net" (solid): 975,790 1425,790 1425,405 975,405 975,790
GND on Top Layer "Top Layer-No Net" (solid): 567.03,239.09 886.88,239.09 886.88,-220.91 556.88,-220.91 556.88,239.09 567.03,239.09
GND on Top Layer "Top Layer-No Net" (solid): 1910.15,240 2230,240 2230,-215 1900,-215 1900,240 1910.15,240

## Keep-outs
Keep-Out Layer:
  lines w15: 10,-1165 3365,-1165 3365,1165 10,1165 10,-1165

## Silkscreen, mask and mechanical layers (free items; w line width, h text height)
Mechanical 1:
  lines w5: 0,-1180 0,1175 3375,1175 3375,-1175 0,-1175

## Text inside footprints (layer, text, board x,y; h text height)
P1: Top Overlay "1" at 80,1050 h35 r270; Top Overlay "2" at 180,1050 h35 r270; Top Overlay "40" at 180,-1030 h35 r270; Top Overlay "39" at 80,-1030 h35 r270
P6: Top Overlay "6" at 2280,440 h35 r270; Top Overlay "5" at 2180,440 h35 r270; Top Overlay "2" at 2280,800 h35 r270; Top Overlay "1" at 2180,780 h35 r270
P7: Top Overlay "2" at 2945,210 h35 r270; Top Overlay "1" at 2845,190 h35 r270
P10: Top Overlay "2" at 2705,-775 h35 r270; Top Overlay "1" at 2605,-795 h35 r270
P13: Top Overlay "10" at 3235,-265 h50 r270; Top Overlay "9" at 3135,-265 h50 r270; Top Overlay "1" at 3135,275 h50 r270; Top Overlay "2" at 3235,295 h50 r270